# EAGLE board Smashing Vihelmo (EAGLE 9.7.0)

Size 146.34 x 118.3 mm. Coordinates in mm from the lower left corner, seen from the top.
Outline: 0,0 146.34,0 146.34,118.3 0,118.3 0,0
Copper layers (1*16): Top 0.035mm / dielectric 1.5mm / Bottom 0.035mm
Design rules "default": minimum track width 6mil, minimum drill 0.35mm, track to track 6mil, track to pad 6mil, pad to pad 6mil, via to via 6mil, smd to smd 6mil, copper to edge 40mil, drill to drill 6mil, minimum pad ring 10mil, minimum via ring 8mil, stop-mask expansion 4mil, vias tented up to drill 0mil, thermal gap 10mil

## Footprints (pad centres in the part's own frame; a part is rotated, then mirrored left to right if it is on the bottom)
LEDRD254W60D565H860B_B = drill 0.981 pad 1.581: 1 -1.27,0; 2 1.27,0
MQ-XX-SOCKET = drill 1.27: 1 -6.223,6.223; 2 -8.788,0; 3 -6.223,-6.223; 4 6.223,-6.223; 5 8.788,0; 6 6.223,6.223
MOTOR = drill 1.118 pad 3.15 octagon: + 2.54,0; - -2.54,0
PIEZO = drill 1 pad 1.6: 1 -3.5,0; 2 3.5,0
28027 = drill 1.016 long: 1 -2.54,0; 2 0,0; 3 2.54,0
GL5528 = drill 0.8 pad 1.4: 1 -1.702,0; 2 1.702,0
RESAD1016W63L850D250B = drill 0.83 pad 1.43: 1 -5.08,0; 2 5.08,0
78F01T = drill 0.8: 1 -1.27,-3.81; 2 1.27,-3.81; 3 1.27,3.81; 4 -1.27,3.81
TO92 = drill 0.813 octagon: 1 -1.27,0; 2 0,1.905; 3 1.27,0
ARDUINO-UNO-R3-SHIELD = drill 1.016 pad 1.88: 3.3V 24.13,-2.54; 5V 24.13,0; A0 24.13,12.7; A1 24.13,15.24; A2 24.13,17.78; A3 24.13,20.32; A4 24.13,22.86; A5 24.13,25.4; AREF -24.13,-13.97; D2 -24.13,20.32; D3 -24.13,17.78; D4 -24.13,15.24; D5 -24.13,12.7; D6 -24.13,10.16; D7 -24.13,7.62; D8 -24.13,3.81; D9 -24.13,1.27; D10 -24.13,-1.27; D11 -24.13,-3.81; D12 -24.13,-6.35; D13 -24.13,-8.89; GND@0 24.13,2.54; GND@1 24.13,5.08; GND@2 -24.13,-11.43; IOREF 24.13,-7.62; NC 24.13,-10.16; RES 24.13,-5.08; RX -24.13,25.4; SCL -24.13,-19.05; SDA -24.13,-16.51; TX -24.13,22.86; VIN 24.13,7.62

## Placement (x,y rotation side)
DLED  BLUE  [LEDRD254W60D565H860B_B]  37.13,32 180 top
GAS1  GAS-SENSORMQ-XX-SOCKET  [MQ-XX-SOCKET]  54.91,14.22 180 top
MDC_MOTOR  MOTOR_HDR  [MOTOR]  113.41,57.62 0 top
PIEZO1  PIEZO  [PIEZO]  11.73,29.46 180 top
PIRMOTION_SENSOR  PIR-SENSOR_28027  [28027]  125.39,29.92 0 top
R1  PHOTOCELL_GL5528  [GL5528]  26.98,34.54 0 top
R2  10k  [RESAD1016W63L850D250B]  25.7,24.38 90 top
R3  10k  [RESAD1016W63L850D250B]  72.11,16.76 150 top
RRESISTOR  1k  [RESAD1016W63L850D250B]  35.87,24.38 90 top
SW2  DPST78F01T  [78F01T]  77.78,23.11 180 top
U1  TMP36GT9Z_TO92  [TO92]  68.89,34.54 0 top
UARDUINO_UNO_  ARDUINO-UNO-R3-SHIELD  [ARDUINO-UNO-R3-SHIELD]  48.84,88.45 270 top

## Library data of the parts
DLED = Tinkercad; CATEGORY: Opto-Electronic; SUB-CATEGORY: LED; VALUE: LED_BLUE
GAS1 MDC_MOTOR PIEZO1 PIRMOTION_SENSOR R1-R3 RRESISTOR SW2 U1 UARDUINO_UNO_ = Tinkercad

## Nets
DLED_C: DLED.2 RRESISTOR.2
UARDUINO_UNO__5V: GAS1.4 GAS1.5 GAS1.6 PIRMOTION_SENSOR.2 R1.2 SW2.1 U1.3 UARDUINO_UNO_.5V
UARDUINO_UNO__A0: U1.2 UARDUINO_UNO_.A0
UARDUINO_UNO__A1: R1.1 R2.2 UARDUINO_UNO_.A1
UARDUINO_UNO__A2: DLED.1 UARDUINO_UNO_.A2
UARDUINO_UNO__A4: GAS1.1 GAS1.2 GAS1.3 R3.1 R3.2 SW2.3 UARDUINO_UNO_.A4 UARDUINO_UNO_.D7
UARDUINO_UNO__D3: MDC_MOTOR.+ UARDUINO_UNO_.D3
UARDUINO_UNO__D4: PIRMOTION_SENSOR.1 UARDUINO_UNO_.D4
UARDUINO_UNO__D9: PIEZO1.2 UARDUINO_UNO_.D9
UARDUINO_UNO__GND: MDC_MOTOR.- PIEZO1.1 PIRMOTION_SENSOR.3 R2.1 RRESISTOR.1 SW2.2 U1.1 UARDUINO_UNO_.GND@0 UARDUINO_UNO_.GND@1 UARDUINO_UNO_.GND@2

## Tracks (layer width: path | path; a pad name or v marks a point on that pad's centre or on a via)
DLED_C  (1 unrouted)
UARDUINO_UNO__5V  (7 unrouted)
UARDUINO_UNO__A0  (1 unrouted)
UARDUINO_UNO__A1  (2 unrouted)
UARDUINO_UNO__A2  (1 unrouted)
UARDUINO_UNO__A4  (7 unrouted)
UARDUINO_UNO__D3  (1 unrouted)
UARDUINO_UNO__D4  (1 unrouted)
UARDUINO_UNO__D9  (1 unrouted)
UARDUINO_UNO__GND  (9 unrouted)